# EAGLE board M_3x4 (EAGLE 9.6.2)
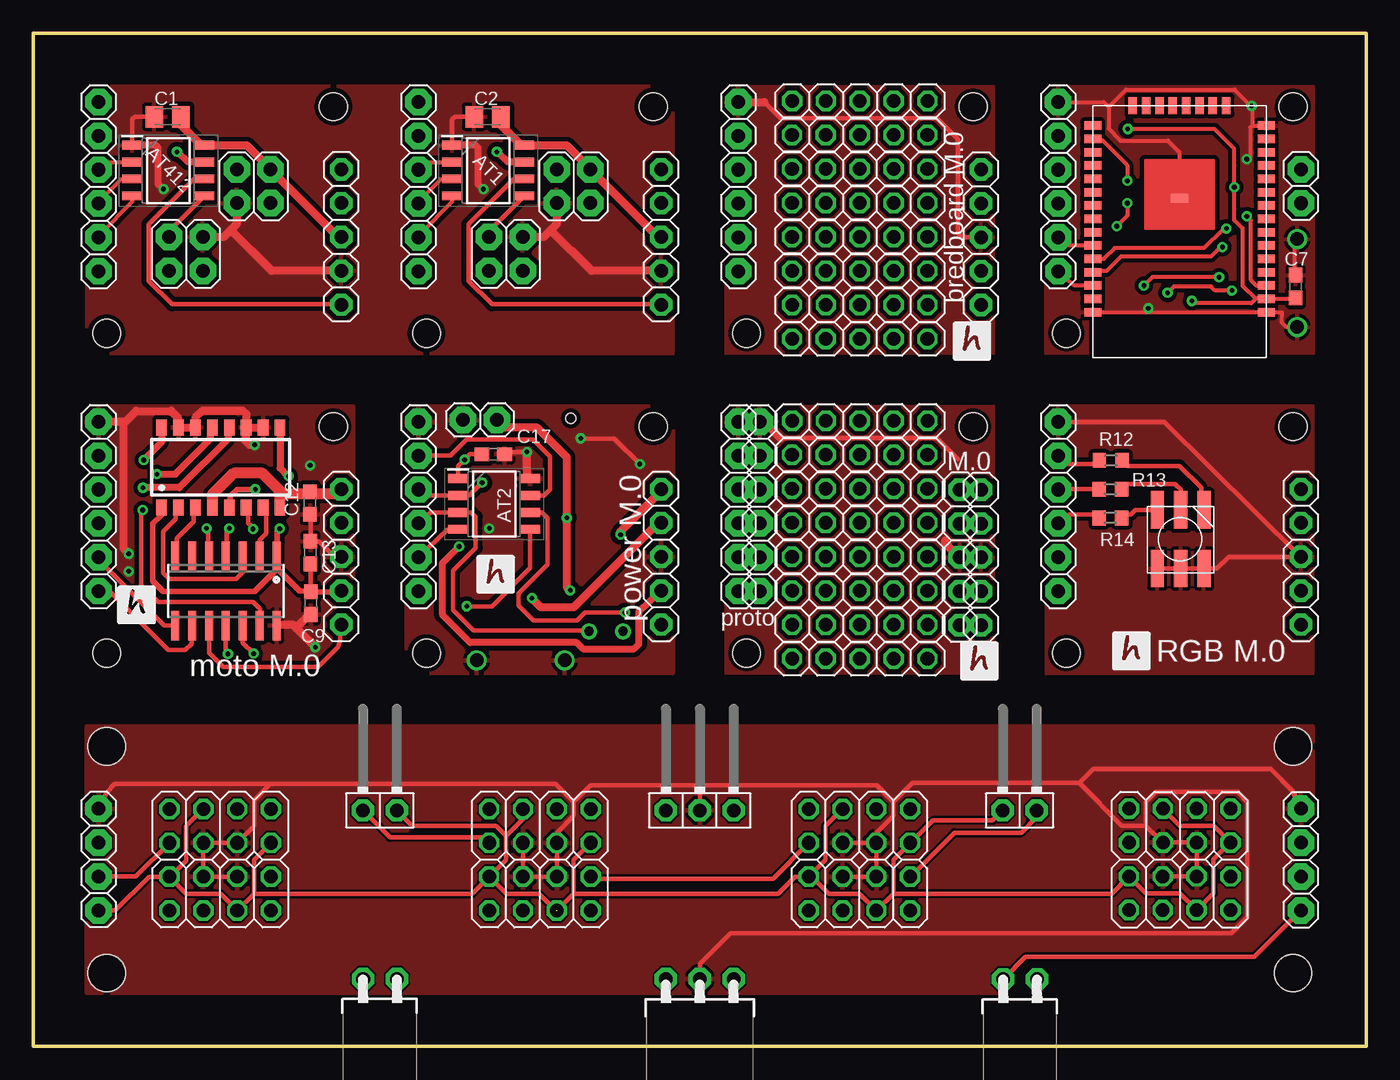
[diagram p0: board, top side]
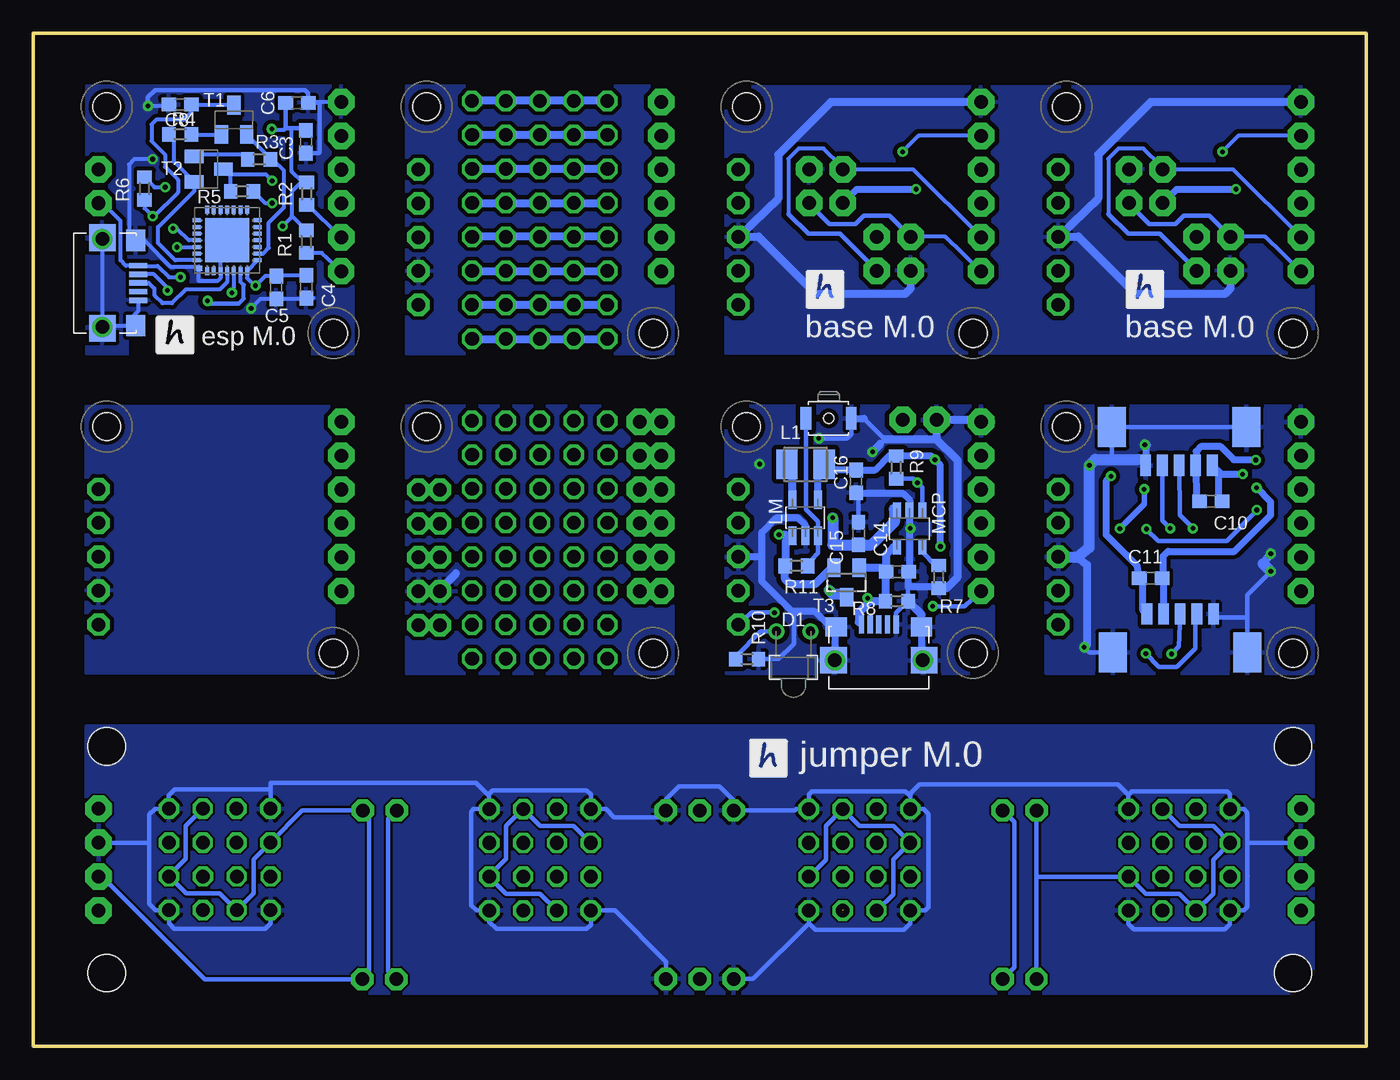
[diagram p1: board, bottom side, seen from below]

Size 100 x 76 mm. Coordinates in mm from the lower left corner, seen from the top.
Outline: 0,0 100,0 100,76 0,76 0,0
Copper layers (1*16): Top 0.035mm / dielectric 1.5mm / Bottom 0.035mm
Design rules "default *": minimum track width 10mil, minimum drill 0.35mm, track to track 6mil, track to pad 6mil, pad to pad 6mil, via to via 6mil, smd to smd 6mil, copper to edge 0mil, drill to drill 15mil, minimum pad ring 10mil, minimum via ring 8mil, stop-mask expansion 4mil, vias tented up to drill 0mil, thermal gap 10mil
Holes 2.1 mm at 70.5,70.5 53.5,53.5 70.5,46.5 53.5,29.5 5.5,53.5 22.5,70.5 29.5,53.5 46.5,70.5 77.5,53.5 94.5,70.5 5.5,29.5 22.5,46.5 29.5,29.5 46.5,46.5 77.5,29.5 94.5,46.5
Holes 2.8 mm at 94.5,5.5 94.5,22.5 5.5,22.5 5.5,5.5

## Footprints (pad centres in the part's own frame; a part is rotated, then mirrored left to right if it is on the bottom)
SOIC127P600X175-8N = smd 1.5 x 0.65: 1 -2.7,1.905; 2 -2.7,0.635; 3 -2.7,-0.635; 4 -2.7,-1.905; 5 2.7,-1.905; 6 2.7,-0.635; 7 2.7,0.635; 8 2.7,1.905
C0805K = smd 1.3 x 1.6: 1 -1,0; 2 1,0
C0603 = smd 1.1 x 1: 1 -0.85,0; 2 0.85,0
LED1.8 = drill 0.7: A -1.27,-0.4; K 1.27,-0.4
MLP28 = smd 0.6 x 0.3: 1 -2.3,1.5; 2 -2.3,1; 3 -2.3,0.5; 4 -2.3,0; 5 -2.3,-0.5; 6 -2.3,-1; 7 -2.3,-1.5; 15 2.3,-1.5; 16 2.3,-1; 17 2.3,-0.5; 18 2.3,0; 19 2.3,0.5; 20 2.3,1; 21 2.3,1.5 | smd 0.3 x 0.6: 8 -1.5,-2.3; 9 -1,-2.3; 10 -0.5,-2.3; 11 0,-2.3; 12 0.5,-2.3; 13 1,-2.3; 14 1.5,-2.3; 22 1.5,2.3; 23 1,2.3; 24 0.5,2.3; 25 0,2.3; 26 -0.5,2.3; 27 -1,2.3; 28 -1.5,2.3 | smd 3.3 x 3.3: EXP 0,0 | smd 0.435 x 0.435: M -2.103,2.103
SO14 = smd 0.6 x 2.2: 1 -3.81,-2.6; 2 -2.54,-2.6; 3 -1.27,-2.6; 4 0,-2.6; 5 1.27,-2.6; 6 2.54,-2.6; 7 3.81,-2.6; 8 3.81,2.6; 9 2.54,2.6; 10 1.27,2.6; 11 0,2.6; 12 -1.27,2.6; 13 -2.54,2.6; 14 -3.81,2.6
1X06 = drill 1.016 pad 1.93 octagon: 1 -6.35,0 | drill 1.016 pad 1.981 octagon: 2 -3.81,0; 3 -1.27,0; 4 1.27,0; 5 3.81,0; 6 6.35,0
2X02 = drill 1.016 pad 1.981 octagon: 1 -1.27,-1.27; 2 -1.27,1.27; 3 1.27,-1.27; 4 1.27,1.27
1X05 = drill 1.016 pad 1.676 octagon: 1 -5.08,0; 2 -2.54,0; 3 0,0; 4 2.54,0; 5 5.08,0
1X02 = drill 1.016 pad 1.981 octagon: 1 -1.27,0; 2 1.27,0
2X04 = drill 1.016 octagon: 1 -3.81,-1.27; 2 -3.81,1.27; 3 -1.27,-1.27; 4 -1.27,1.27; 5 1.27,-1.27; 6 1.27,1.27; 7 3.81,-1.27; 8 3.81,1.27
1X02/90F = drill 1.016 pad 1.676 octagon: 1 -1.31,0; 2 1.23,0
1X02/90 = drill 1.016 pad 1.676 octagon: 1 -1.27,-3.81; 2 1.27,-3.81
1X03/90 = drill 1.016 pad 1.676 octagon: 1 -2.54,-3.81; 2 0,-3.81; 3 2.54,-3.81
1X03/90F = drill 1.016 pad 1.676 octagon: 1 -2.54,0; 2 0,0; 3 2.54,0
1X04 = drill 1.016 pad 1.981 octagon: 1 -3.81,0; 2 -1.27,0; 3 1.27,0; 4 3.81,0
L3230M = smd 1.6 x 2.2: 1 -1.4,0; 2 1.4,0
SOT32-5 = smd 0.6 x 1.4: BP 0.95,1.35; GND 0,-1.35; SHDN 0.95,-1.35; VIN -0.95,-1.35; VOUT -0.95,1.35
SOT23-5 = smd 0.6 x 1.1: 1 -0.95,-1.45; 2 0,-1.45; 3 0.95,-1.45; 4 0.95,1.35; 5 -0.95,1.35
SOP16 = smd 0.8 x 1.2: 1 -4.445,-3; 2 -3.175,-3; 3 -1.905,-3; 4 -0.635,-3; 5 0.635,-3; 6 1.905,-3; 7 3.175,-3; 8 4.445,-3; 9 4.445,3; 10 3.175,3; 11 1.905,3; 12 0.635,3; 13 -0.635,3; 14 -1.905,3; 15 -3.175,3; 16 -4.445,3
R0603 = smd 1 x 1.1: 1 -0.85,0; 2 0.85,0
BUTTON-B3U = smd 0.8 x 1.7: P$1 -1.7,0; P$2 1.7,0 | hole 0.75: 0,0
SOT23-BEC = smd 1 x 1.4: B -0.95,-1.1; C 0,1.1; E 0.95,-1.1
SOT23 = smd 1 x 1.4: D 0,1.1; G -0.95,-1.1; S 0.95,-1.1
1X5_AUTO = drill 1.016 octagon: 1 -5.08,0; 2 -2.54,0; 3 0,0; 4 2.54,0; 5 5.08,0
TTGO-MICRO-32 = smd 1.27 x 0.635: 3V3 -6.5,5; EN -6.5,4; GND1 -6.5,6; GND2 -6.5,-8; GND3 6.5,6; GND4 0,-2.54; IO0 6.5,-7; IO2 6.5,-8; IO4 6.5,-6; IO5 6.5,-3; IO12 -6.5,-7; IO14 -6.5,-6; IO16 6.5,-5; IO17 6.5,-4; IO18 6.5,-2; IO19 6.5,-1; IO21 6.5,1; IO22 6.5,4; IO23 6.5,5; IO25 -6.5,-3; IO26 -6.5,-4; IO27 -6.5,-5; IO32 -6.5,-1; IO33 -6.5,-2; IO34 -6.5,1; IO35 -6.5,0; NC 6.5,0; RXD0 6.5,2; TXD0 6.5,3; VN -6.5,2; VP -6.5,3 | smd 0.635 x 1.27: CLK 0.5,-9.5; CMD -0.5,-9.5; IO13 -3.5,-9.5; IO15 3.5,-9.5; SD0 1.5,-9.5; SD1 2.5,-9.5; SD2 -2.5,-9.5; SD3 -1.5,-9.5
A1250WR = smd 0.8 x 1.6: 1 -2.46,2.54; 2 -1.21,2.54; 3 0.04,2.54; 4 1.29,2.54; 5 2.54,2.54 | smd 2.1 x 3: $1 -5.01,-0.34; $2 5.08,-0.34
RGB_WW-FCE50TC-Q1 = smd 1 x 2.8: 1 -1.778,-2.286; 2 -0.028,-2.286; 3 1.722,-2.286; 4 -1.778,2.114; 5 -0.028,2.114; 6 1.722,2.114
MICRO-USB = smd 0.4 x 1.35: D+ 0,2.5; D- -0.65,2.5; GND 1.3,2.5; NC 0.65,2.5; VUSB -1.3,2.5 | smd 2 x 2: GND1 -3.4,-0.2; GND2 3.4,-0.2 | smd 1.6 x 1.4: GND3 -3.202,2.3; GND4 3.2,2.3 | drill 1: P$1 -3.3,-0.2; P$2 3.3,-0.2

## Placement (x,y rotation side)
AT1  AT412  [SOIC127P600X175-8N]  34.13,65.7 0 top
AT2  AT412  [SOIC127P600X175-8N]  34.59,40.68 0 top
AT412  AT412  [SOIC127P600X175-8N]  10.13,65.7 0 top
C1  100n  [C0805K]  10.08,69.74 0 top
C2  100n  [C0805K]  34.08,69.74 0 top
C3  100n  [C0603]  79.54,67.86 270 bottom
C4  100n  [C0603]  79.51,56.99 90 bottom
C5  10u  [C0603]  81.77,56.94 90 bottom
C6  100n  [C0603]  80.22,70.78 0 bottom
C7  0.1F  [C0603]  94.7,57.01 90 top
C8  2u2  [C0603]  88.99,70.65 180 bottom
C9  100n  [C0603]  20.82,33.24 90 top
C10  100n  [C0603]  11.65,40.89 0 bottom
C11  100n  [C0603]  16.17,35.12 180 bottom
C12  4u7  [C0603]  20.75,40.76 90 top
C13  4u7  [C0603]  20.79,37.03 270 top
C14  4u7  [C0603]  35.17,35.6 180 bottom
C15  4u7  [C0603]  38.09,38.47 270 bottom
C16  10u  [C0603]  38.27,42.38 90 bottom
C17  100n  [C0603]  34.51,44.42 0 top
D1  LED1.8  [LED1.8]  42.97,30.73 180 bottom
IC1  CP2102  [MLP28]  85.46,60.47 90 bottom
IC2  AT414  [SO14]  14.45,34.15 180 top
JP1  [1X06]  28.9,64.5 90 top
JP2  [1X06]  4.9,64.5 90 top
JP3  [2X02]  16.53,64.53 0 top
JP4  [2X02]  11.45,59.46 0 top
JP5  [1X05]  23.1,60.72 270 top
JP6  [2X02]  40.53,64.53 0 top
JP7  [2X02]  35.45,59.46 0 top
JP8  [1X05]  47.1,60.72 270 top
JP9  [1X06]  52.9,64.5 90 top
JP10  [1X06]  76.9,64.5 90 top
JP11  [1X05]  71.1,60.7 270 top
JP12  [1X02]  95.1,64.53 270 top
JP13  [1X06]  4.9,40.5 90 top
JP14  [1X05]  23.1,36.72 270 top
JP15  [1X06]  28.9,40.5 90 top
JP16  [1X05]  47.1,36.72 270 top
JP17  [1X06]  52.9,40.5 90 top
JP18  [1X05]  71.1,36.67 270 top
JP19  [1X06]  54.5,40.5 90 top
JP20  [1X05]  69.5,36.68 270 top
JP21  [1X06]  76.9,40.5 90 top
JP22  [1X05]  95.1,36.72 270 top
JP23  [2X04]  14.02,16.53 180 top
JP24  [1X02/90F]  25.97,5.04 180 top
JP25  [2X04]  14.02,11.45 180 top
JP26  [2X04]  38.01,16.53 180 top
JP27  [2X04]  38.01,11.45 180 top
JP28  [2X04]  61.98,16.53 180 top
JP29  [2X04]  61.98,11.45 180 top
JP30  [1X02/90]  26,21.5 0 top
JP31  [1X03/90]  50,21.5 0 top
JP32  [1X03/90F]  50,5.04 180 top
JP33  [2X04]  86.01,11.47 0 top
JP34  [2X04]  86.02,16.55 0 top
JP35  [1X02/90F]  74,5.02 180 top
JP36  [1X02/90]  74,21.5 0 top
JP37  [1X04]  4.9,14 270 top
JP38  [1X04]  95.1,14 90 top
L1  2u2  [L3230M]  42.05,43.65 0 bottom
LIPOL  [1X02]  33.5,47 0 top
LM  TC  [SOT32-5]  42.08,39.64 0 bottom
MCP  MCP  [SOT23-5]  34.26,38.78 180 bottom
MX1  MX1508  [SOP16]  14.07,43.43 0 top
R1  2k2  [R0603]  79.51,60.36 90 bottom
R2  2k2  [R0603]  79.49,63.97 90 bottom
R3  12k  [R0603]  83.07,66.54 180 bottom
R4  12k  [R0603]  88.99,68.42 0 bottom
R5  12k  [R0603]  84.34,64.15 0 bottom
R6  12k  [R0603]  91.65,64.35 270 bottom
R7  22k  [R0603]  32.07,35.22 90 bottom
R8  100k  [R0603]  35.22,33.39 180 bottom
R9  100k  [R0603]  35.27,43.43 270 bottom
R10  2k2  [R0603]  46.45,29.05 180 bottom
R11  100k  [R0603]  42.74,36.03 0 bottom
R12  330  [R0603]  80.83,43.95 0 top
R13  330  [R0603]  80.81,41.8 0 top
R14  330  [R0603]  80.81,39.63 0 top
RESET  BYTTON-B3U  [BUTTON-B3U]  40.33,47.11 0 bottom
T1  [SOT23-BEC]  84.95,69.51 0 bottom
T2  [SOT23-BEC]  86.83,65.8 270 bottom
T3  FDV  [SOT23]  38.98,34.79 180 bottom
U$1  PINHD-1X5_AUTO  [1X5_AUTO]  62.01,70.93 0 top
U$2  PINHD-1X5_AUTO  [1X5_AUTO]  62,68.38 0 top
U$3  PINHD-1X5_AUTO  [1X5_AUTO]  62,65.82 0 top
U$4  PINHD-1X5_AUTO  [1X5_AUTO]  62,63.27 0 top
U$5  PINHD-1X5_AUTO  [1X5_AUTO]  62,60.73 0 top
U$6  PINHD-1X5_AUTO  [1X5_AUTO]  62,58.17 0 top
U$7  PINHD-1X5_AUTO  [1X5_AUTO]  62,55.62 0 top
U$8  PINHD-1X5_AUTO  [1X5_AUTO]  62,53.07 0 top
U$9  TTGO-MICRO-32  [TTGO-MICRO-32]  85.99,61.08 180 top
U$10  A1250WR  [A1250WR]  14,46.12 180 bottom
U$11  PINHD-1X5_AUTO  [1X5_AUTO]  62.01,46.93 0 top
U$12  PINHD-1X5_AUTO  [1X5_AUTO]  62,44.38 0 top
U$13  PINHD-1X5_AUTO  [1X5_AUTO]  62,41.82 0 top
U$14  PINHD-1X5_AUTO  [1X5_AUTO]  62,39.27 0 top
U$15  PINHD-1X5_AUTO  [1X5_AUTO]  62,36.73 0 top
U$16  PINHD-1X5_AUTO  [1X5_AUTO]  62,34.17 0 top
U$17  PINHD-1X5_AUTO  [1X5_AUTO]  62,31.62 0 top
U$18  PINHD-1X5_AUTO  [1X5_AUTO]  62,29.07 0 top
U$19  RGB_WW-FCE50TC-Q1  [RGB_WW-FCE50TC-Q1]  86.05,37.95 180 top
USB  MICRO-USB  [MICRO-USB]  94.62,57.27 270 bottom
USB1  MICRO-USB  [MICRO-USB]  36.57,29.15 0 bottom
X22  A1250WR  [A1250WR]  14,29.89 0 bottom

## Library data of the parts
AT1 AT2 AT412 = ATTINY412-SSN; DESCRIPTION: 8-bit Microcontrollers - MCU 20MHz, 4KB, SOIC8, Ind 105C, Green, Tube; HEIGHT: 1.75mm; MANUFACTURER_NAME: Microchip; MANUFACTURER_PART_NUMBER: ATTINY412-SSN; MOUSER_PART_NUMBER: 579-ATTINY412-SSN; MOUSER_PRICE-STOCK: https://www.mouser.co.uk/ProductDetail/Microchip-Technology/ATTINY412-SSN?qs=3HJ2avRr9PItQG9ZsCamPQ%3D%3D
C1-C17 = rcl; SPICEPREFIX: C
D1 LM MCP RESET T3 U$19 = !stavebnice03
IC1 = silabs; MF: FARNELL; MPN: CP2102-GM; OC_FARNELL: 9282130; OC_NEWARK: 30K5635
IC2 = atmel
JP1-JP38 LIPOL U$1-U$8 U$11-U$18 = pinhead2
L1 = rcl; SPICEPREFIX: L
MX1 U$9 U$10 USB USB1 X22 = hugo
R1-R11 = rcl; SPICEPREFIX: R
R12-R14 = resistor
T1 T2 = transistor

## Nets
FOTO1: IC2.5 U$10.3
FOTO2: IC2.12 X22.4
GND: AT1.8 AT412.8 C1.2 C2.2 JP1.6 JP2.6 JP3.4 JP4.1 JP5.3 JP6.4 JP7.1 JP8.3
GND1: JP9.6 JP11.3
GND2: C3.2 C4.1 C5.1 C6.2 C7.2 C8.2 IC1.3 IC1.EXP IC1.M JP10.6 U$9.GND1 U$9.GND2 U$9.GND3 U$9.GND4 USB.GND USB.GND1 USB.GND2 USB.GND3 USB.GND4 USB.P$1 USB.P$2
GND3: C9.1 C12.1 C13.1 IC2.14 JP13.6 JP14.3 MX1.10 MX1.11 MX1.14 MX1.15 U$10.5 U$10.$1 U$10.$2 X22.5 X22.$1 X22.$2
GND4: AT2.8 C14.1 C15.1 C16.1 C17.2 JP15.6 JP16.3 LIPOL.1 LM.GND MCP.2 R7.1 R8.1 R10.1 RESET.P$2 USB1.GND USB1.GND1 USB1.GND2 USB1.GND3 USB1.GND4 USB1.P$1 USB1.P$2
GND5: JP17.6 JP18.3 JP19.6 JP20.3
GND6: JP21.6 JP22.3 U$19.4 U$19.5 U$19.6
GND7: JP23.1 JP23.7 JP25.2 JP25.8 JP26.1 JP26.7 JP27.2 JP27.8 JP28.1 JP28.7 JP29.2 JP29.8 JP31.1 JP31.3 JP32.1 JP32.3 JP33.1 JP33.7 JP34.2 JP34.8 JP37.2 JP38.3
INA1: IC2.3 MX1.2
INA2: IC2.13 MX1.6
INB1: IC2.7 MX1.3
INB2: IC2.2 MX1.7
LED1: IC2.4 U$10.4
LED2: IC2.11 X22.3
M1: C10.2 MX1.13 U$10.1
M2: C10.1 MX1.16 U$10.2
M3: C11.2 MX1.9 X22.1
M4: C11.1 MX1.12 X22.2
M_SRC: C12.2 JP14.1 MX1.4 MX1.8
N$1: U$1.1 U$1.2 U$1.3 U$1.4 U$1.5
N$2: U$2.1 U$2.2 U$2.3 U$2.4 U$2.5
N$3: U$3.1 U$3.2 U$3.3 U$3.4 U$3.5
N$4: U$4.1 U$4.2 U$4.3 U$4.4 U$4.5
N$5: U$5.1 U$5.2 U$5.3 U$5.4 U$5.5
N$6: U$6.1 U$6.2 U$6.3 U$6.4 U$6.5
N$7: U$7.1 U$7.2 U$7.3 U$7.4 U$7.5
N$8: U$8.1 U$8.2 U$8.3 U$8.4 U$8.5
N$9: IC1.5 USB.D-
N$10: IC1.4 USB.D+
N$11: IC1.25 U$9.RXD0
N$12: IC1.26 U$9.TXD0
N$13: R4.2 T1.B
N$14: R3.2 T2.B
N$15: IC1.9 R3.1 T1.E
N$16: IC1.28 R4.1 T2.E
N$17: R5.1 T2.C U$9.IO0
N$18: C8.1 R6.2 T1.C U$9.EN
N$19: U$9.IO2
N$20: IC2.9 JP13.1
N$21: IC2.8 JP13.2
N$22: IC2.10 JP14.5
N$23: C15.2 LIPOL.2 MCP.3 T3.D
N$24: C14.2 JP16.2 MCP.4 R8.2 T3.G USB1.VUSB
N$25: MCP.5 R7.2
N$26: JP16.1 LM.VIN R11.1 T3.S
N$27: D1.K R10.2
N$28: LM.SHDN R11.2 RESET.P$1
N$29: L1.1 LM.VOUT
N$30: JP17.5 JP19.5
N$31: JP17.4 JP19.4
N$32: JP17.3 JP19.3
N$33: JP17.2 JP19.2
N$34: JP17.1 JP19.1
N$35: JP18.5 JP20.5
N$36: JP18.2 JP20.2
N$37: JP18.1 JP20.1
N$38: R13.2 U$19.2
N$39: R12.2 U$19.1
N$40: R14.2 U$19.3
N$41: JP21.5 R12.1
N$42: JP21.4 R13.1
N$43: JP21.3 R14.1
PA1: AT1.7 JP1.5
PA2: AT1.2 JP1.4
PA3: AT412.7 JP2.5
PA4: AT1.3 JP1.3
PA5: AT2.7 JP15.5
PA6: AT412.2 JP2.4
PA7: AT412.3 JP2.3
PA8: AT2.2 JP15.4 MCP.1 R9.2
PA9: AT2.3 D1.A JP15.3
SCL: AT412.5 JP2.1 JP3.3 JP4.2
SCL1: AT1.5 JP1.1 JP6.3 JP7.2
SCL2: JP10.1 R1.1 U$9.IO22
SCL3: AT2.5 JP15.1
SCL4: JP23.2 JP23.5 JP24.1 JP25.4 JP25.7 JP26.2 JP26.5 JP27.4 JP27.7 JP28.2 JP28.5 JP29.4 JP29.7 JP30.2 JP33.2 JP33.5 JP34.4 JP34.7 JP35.2 JP36.1 JP37.4 JP38.1
SDA: AT412.4 JP2.2 JP3.2 JP4.3
SDA1: AT1.4 JP1.2 JP6.2 JP7.3
SDA2: JP10.2 R2.1 U$9.IO21
SDA3: AT2.4 JP15.2
SDA4: JP23.3 JP23.8 JP24.2 JP25.1 JP25.6 JP26.3 JP26.8 JP27.1 JP27.6 JP28.3 JP28.8 JP29.1 JP29.6 JP30.1 JP33.3 JP33.8 JP34.1 JP34.6 JP35.1 JP36.2 JP37.3 JP38.2
UPDI: AT412.6 JP5.5
UPDI1: AT1.6 JP8.5
UPDI2: AT2.6 JP16.5
VCC: C9.2 C13.2 IC2.1 JP14.4 MX1.1 MX1.5
VCC1: JP23.4 JP23.6 JP25.3 JP25.5 JP26.4 JP26.6 JP27.3 JP27.5 JP28.4 JP28.6 JP29.3 JP29.5 JP31.2 JP32.2 JP33.4 JP33.6 JP34.3 JP34.5 JP37.1 JP38.4
VDD: AT1.1 AT412.1 C1.1 C2.1 JP3.1 JP4.4 JP5.4 JP6.1 JP7.4 JP8.4
VDD1: JP11.4
VDD2: C3.1 C6.1 C7.1 IC1.6 R1.2 R2.2 R5.2 R6.1 U$9.3V3
VDD3: AT2.1 C16.2 C17.1 JP16.4 L1.2 LM.BP R9.1
VDD4: JP18.4 JP20.4
VDD5: JP22.4
VUSB: C4.2 C5.2 IC1.7 IC1.8 JP12.2 USB.VUSB

## Tracks (layer width: path | path; a pad name or v marks a point on that pad's centre or on a via)
FOTO1  (via drill 0.35)
  Top 0.356: IC2.5 13.13,36.81 13.13,38.73 v13,38.85
  Bottom 0.356: v13,38.85 13,38.88 13.98,39.86 14.01,43.55 U$10.3
FOTO2  (via drill 0.35)
  Top 0.356: IC2.12 15.72,30.27 v16.53,29.46
  Bottom 0.356: v16.53,29.46 15.54,28.46 14.19,28.46 12.8,29.86 12.8,32.43 X22.4
GND
  Top 0.61: C1.2 11.08,69.1 12.58,67.6 AT412.8 12.87,67.57 16.03,67.57 JP3.4 17.8,65.78 22.86,60.72 JP5.3 | C2.2 35.08,69.1 36.58,67.6 AT1.8 36.87,67.57 40.03,67.57 JP6.4 41.8,65.78 46.86,60.72 JP8.3
  Bottom 0.61: 10.14,58.15 JP4.1 10.19,56.86 10.61,56.44 17.27,56.44 21.58,60.74 22.98,60.74 JP5.3 20.11,63.61 20.11,66.9 16.16,70.85 JP2.6 | 34.14,58.15 JP7.1 34.19,56.86 34.6,56.44 41.27,56.44 45.58,60.74 46.98,60.74 JP8.3 44.11,63.61 44.11,66.9 40.16,70.85 JP1.6
  pour Bottom (isolate 0.356): 4,72 4,52 48,52 48,72
GND1
  Top 0.356: 54.85,70.85 56.07,69.63 56.38,69.63 56.39,69.65 67.78,69.65 69.35,68.07 69.35,61.01 69.66,60.7 JP11.3
  Top 0.61: JP9.6 54.85,70.85
  pour Top (isolate 0.305): 52,72 72,72 72,52 52,52
GND2  (via drill 0.35)
  Top 0.305: 91.45,69.08 U$9.GND2 | 91.45,69.08 91.3,68.92 91.3,66.81 v91.05,66.56 | U$9.GND4 85.99,67.1 85.13,67.96 81.57,67.96 80.68,68.85 80.68,70.48 | USB.P$1 94.61,60.36 94.61,57.95 C7.2 | 83.55,55.06 92.47,55.06 U$9.GND1 92.52,55.05 93.69,55.05 93.69,54.29 94.02,53.97 USB.P$2 | 83.55,55.06 79.75,55.06 79.73,55.08 U$9.GND3 79.36,55.08 | 91.45,69.08 91.45,70.5 v91.4,70.55 91.33,70.55 90.11,71.77 81.97,71.77 80.68,70.48 | v83.65,55.36 83.65,55.16 83.55,55.06 | JP10.6 80.31,70.85 80.68,70.48
  Bottom 0.305: IC1.3 85.96,59.97 IC1.EXP | IC1.3 85.98,58.15 | 92.7,54.02 92.37,54.02 USB.GND4 | 92.7,54.02 94.67,54.02 USB.GND2 USB.GND1 | 94.72,60.47 USB.P$1 | 91.08,66.6 v91.05,66.56 92.42,66.56 92.83,66.15 92.83,60.98 USB.GND3 91.68,60.47 89.72,58.51 87.56,58.51 87.46,58.4 IC1.M 87.59,58.33 87.59,57.41 86.18,57.41 85.95,57.64 IC1.3 | C8.2 89.94,70.55 v91.4,70.55 | 92.7,54.02 92.64,54.07 92.64,54.64 92.12,55.16 USB.GND | C4.1 79.56,56.09 C5.1 82.93,56.09 v83.65,55.36 | JP10.6 79.3,70.85 C6.2
  Bottom 0.356: C3.2 78.58,67.01 78.52,67.07 78.52,70.68 78.62,70.78 C6.2 79.37,71.52 79.6,71.74 90.87,71.74 91.4,71.21 v91.4,70.55 | C4.1 79.01,56.14
  pour Top (isolate 0.305): 76,52 76,72 96,72 96,52
  pour Bottom (isolate 0.305): 76,72 96,72 96,52 76,52
GND3  (via drill 0.35)
  Top 0.356: 20.04,31.68 20.04,31.61 19.76,31.34 | C12.1 20.79,39.87 C13.1 21.44,37.88 22.6,36.72 JP14.3
  Top 0.61: C9.1 20.74,32.39 20.04,31.68 19.98,31.63 | IC2.14 18.26,31.63 19.46,31.63 19.76,31.34 v21.15,29.94 | MX1.11 MX1.10 | MX1.11 15.97,47.41 15.72,47.67 12.67,47.67 12.16,47.16 MX1.14 MX1.15 10.86,46.46 10.86,47.15 10.35,47.66 7.7,47.66 6.77,46.73 6.75,46.73 | MX1.11 15.92,46.38 15.92,45.43 16.23,45.13 v16.61,45.13 | JP13.6 5.02,46.83 6.75,46.83 6.75,46.73 | 6.75,46.73 6.75,37.36 v7.16,36.95
  Bottom 0.305: 20.95,30.14 v21.15,29.94 | 17.08,44.02 16.99,44.02 U$10.5
  Bottom 0.356: 7.72,36.19 7.85,36.19 7.87,36.19 | v7.16,35.63 8.91,33.87 8.91,32.17 8.92,32.17 | 8.92,32.17 X22.$2 | X22.$1 20.76,29.55 20.99,29.73 20.99,29.78 v21.15,29.94 | X22.5 11.3,32.17 8.92,32.17 | 19.02,44.02 19.08,44.09 U$10.$2 U$10.$1
  Bottom 0.508: U$10.5 16.51,45.02 16.45,45.07
  Bottom 0.61: v16.61,45.13 16.51,45.13 16.45,45.07 | v7.16,36.95 7.16,36.88 7.85,36.19 | JP14.3 21.73,36.72 20.95,36.12 20.95,30.14
  Bottom 0.813: 17.08,44.02 19.02,44.02 20.33,44.02 v20.77,43.58 20.77,37.4 21.63,36.72 JP14.3 | v7.16,35.63 7.72,36.19
  pour Top (isolate 0.305): 4,48 4,28 24,28 24,48
  pour Bottom (isolate 0.305): 4,48 4,28 24,28 24,48
GND4  (via drill 0.35)
  Top 0.356: 35.56,44.42 C17.2 35.54,44.59 v37.03,44.59 | v41.06,45.61 43.58,45.61 v45.51,43.68
  Top 0.61: AT2.8 37.03,42.84 v37.03,44.59
  Bottom 0.356: USB1.GND 35.27,32.5 R8.1 34.37,34.43 | R10.1 44.09,29.05 42.94,30.19 42.94,32.48 42.94,32.5 43.05,32.61 | C16.1 38.09,41.36 C15.1 | 37.68,47.11 36.1,45.53 | RESET.P$2 38.63,45.94 38.96,45.61 v41.06,45.61 | v34.21,38.85 34.21,40.18 MCP.2
  Bottom 0.406: 42.69,39.67 42.65,39.67
  Bottom 0.508: C16.1 38.22,41.49 34.77,41.49 34.25,40.96 34.25,40.24 MCP.2 34.26,35.67 C14.1 | C14.1 34.37,35.55 34.37,34.43 34.31,34.5 32.2,34.5 R7.1 31.72,34.37 | 34.37,33.49 R8.1 | C14.1 34.32,35.81 | RESET.P$2 37.68,47.11 | USB1.GND3 | USB1.P$1 39.87,30.97 39.4,31.45 USB1.GND3 | USB1.GND4 33.37,29.15 USB1.GND2 | USB1.GND3 40.19,31.45 41.35,32.61 43.05,32.61 | 45.35,36.72 45.35,38.56 44.24,39.67 42.69,39.67 | 42.65,39.67 42.08,39.1 LM.GND | 45.35,36.72 JP16.3 | 42.94,32.48 45.35,34.88 45.35,36.72
  Bottom 0.61: USB1.GND4 33.37,32.39 R8.1 | JP15.6 29.06,46.85 29.21,47 LIPOL.1 32.23,45.53 | 32.23,45.53 30.68,43.98 30.68,35.16 31.46,34.37 R7.1 | 32.23,45.53 36.09,45.53 36.1,45.53 | 36.45,45.18 v37.03,44.59
  pour Top (isolate 0.356): 28,48 28,28 48,28 48,48
  pour Bottom (isolate 0.356): 28,48 48,48 48,28 28,28
GND5
  Top 0.356: 69.69,36.67 JP18.3 | 56.07,45.63 56.38,45.63 56.39,45.65 67.78,45.65 69.35,44.07
  Top 0.61: JP20.3 68.42,37.71 68.42,37.91 | JP19.6 54.87,46.83 56.07,45.63
  Bottom 0.61: JP18.3 69.51,36.67 JP20.3 | JP19.6 52.94,46.83 JP17.6
  pour Top (isolate 0.305): 52,48 72,48 72,28 52,28
GND6
  Top 0.356: U$19.6 U$19.5 U$19.4 88.8,35.84 89.68,36.72 JP22.3 84.87,46.85 JP21.6
  pour Top (isolate 0.305): 76,48 76,28 96,28 96,48
GND7
  Bottom 0.356: JP28.7 58.17,18.89 58.48,19.19 65.56,19.19 65.89,18.86 | JP28.7 58.17,18.38 | JP26.7 34.2,18.74 34.31,18.85 | 34.31,18.85 34.58,19.12 41.59,19.12 41.82,18.89 JP26.1 42.76,17.8 42.87,17.69 JP31.1 47.46,18.46 48.51,19.51 51.56,19.51 52.54,18.53 JP31.3 53.04,17.19 56.42,17.19 57.03,17.8 JP28.7 | JP26.7 33.21,17.8 32.83,17.41 32.83,10.4 33.06,10.18 JP27.8 34.2,9.21 34.68,8.73 41.34,8.73 41.82,9.21 | JP23.1 17.83,18.85 | 17.83,18.85 17.57,19.12 10.42,19.12 10.21,18.91 JP23.7 9.2,17.8 8.91,17.5 8.91,15.29 | 17.85,9.26 17.83,9.3 JP25.2 17.83,9.17 17.41,8.75 10.61,8.75 10.21,9.15 JP25.8 9.2,10.18 8.91,10.47 8.91,12.72 | 8.91,15.29 8.91,12.72 | JP27.2 41.82,9.21 | JP29.8 58.17,9.11 58.48,8.8 65.26,8.8 65.79,9.34 JP29.2 66.76,10.18 67.16,10.58 67.16,17.59 66.96,17.8 JP28.1 65.79,18.76 65.89,18.86 | JP29.8 58.17,9.54 | JP26.7 34.2,18.81 | 34.31,18.85 33.52,19.65 18.63,19.65 17.83,18.85 | JP34.2 82.21,19.26 | 82.21,19.26 82.21,19.76 66.79,19.76 65.89,18.86 | 91.3,15.18 91.3,17.38 90.86,17.81 JP34.8 89.83,18.82 89.38,19.26 82.21,19.26 | 91.3,15.18 91.3,10.68 90.82,10.2 JP33.7 89.82,9.2 89.43,8.81 82.59,8.81 82.2,9.2 JP33.1 | JP32.3 45.99,5.04 41.82,9.21 | JP32.1 52.54,6.35 56.37,10.18 JP29.8 | 8.9,12.73 8.91,12.72 | JP37.2 8.89,15.27 8.91,15.29 | JP38.3 91.39,15.27 91.3,15.18
  pour Bottom: 96,4 4,4 4,24 96,24
INA1
  Top 0.356: IC2.3 15.72,35.55 15.21,35.04 10.21,35.04 9.75,35.49 9.75,38.6 10.7,39.54 10.7,40.23 MX1.2
INA2  (via drill 0.35)
  Top 0.356: IC2.13 17.01,31.57 17.01,32.81 16.51,33.32 9.37,33.32 8.1,34.58 8.1,40.13 v8.2,40.23 | MX1.6 16.12,40.27 16.12,39.26 16.53,38.85 v16.48,38.8
  Bottom 0.356: v16.48,38.8 16.48,38.78 15.61,37.92 10.47,37.92 8.2,40.19 v8.2,40.23
INB1
  Top 0.356: MX1.3 12.03,40.29 12.03,39.39 10.74,38.1 10.74,36.86 IC2.7
INB2
  Top 0.356: MX1.7 17.47,40.2 17.47,38.47 16.99,37.99 IC2.2
LED1  (via drill 0.35)
  Top 0.356: IC2.4 14.52,36.83 14.52,38.65 14.7,38.83 v14.7,38.85
  Bottom 0.356: U$10.4 15.29,39.44 v14.7,38.85
LED2  (via drill 0.35)
  Top 0.356: IC2.11 14.45,29.58 v14.6,29.43
  Bottom 0.356: v14.6,29.43 14.05,29.98 X22.3
M1  (via drill 0.35)
  Top 0.508: v9.27,42.92 10.65,42.92 13.32,45.59 13.32,46.32 MX1.13
  Bottom 0.508: C10.2 11.06,41.29 11.06,43.09 11.31,43.34 11.54,43.44 U$10.1 10.87,42.94 9.29,42.94 v9.27,42.92
M2  (via drill 0.35)
  Top 0.508: MX1.16 9.62,45.33 v8.28,43.98
  Bottom 0.508: 12.69,40.72 C10.1 12.67,40.87 12.76,40.87 12.78,40.9 | v8.28,43.98 8.3,44.01 9.94,44.01 10.9,44.98 12.41,44.98 12.76,44.64 U$10.2 12.76,40.93 12.78,40.9 | 12.78,40.9 12.75,41.08
M3  (via drill 0.35)
  Top 0.508: v19.15,42.77 19.13,42.75 18.51,43.36 MX1.9
  Bottom 0.356: 17.95,36.82 18,36.87
  Bottom 0.508: v19.15,42.77 19.52,42.4 19.52,38.39 18,36.87 | 17.95,36.82 17.18,36.04 C11.2 16.79,34.74 16.79,32.74 X22.1
M4  (via drill 0.35)
  Top 0.508: v8.22,41.9 10.96,41.9 14.62,45.56 14.62,46.34 MX1.12
  Bottom 0.508: v8.22,41.9 7.16,40.84 7.16,39.85 9.89,37.13 14.87,37.13 15.25,36.75 15.25,35.2 C11.1 15.2,35.12 X22.2
M_SRC
  Top 0.356: C12.2 22.91,41.61 JP14.1
  Top 0.813: 18.5,41.45 MX1.8 18.51,40.53 | 18.5,41.45 18.5,41.67 17.18,42.99 15.03,42.99 13.43,41.39 MX1.4 | JP14.1 22.64,41.45 18.5,41.45
N$1
  Bottom 0.61: U$1.1 U$1.2 U$1.3 U$1.4 U$1.5
N$2
  Bottom 0.61: U$2.5 U$2.4 U$2.3 U$2.2 U$2.1
N$3
  Bottom 0.61: U$3.1 U$3.2 U$3.3 U$3.4 U$3.5
N$4
  Bottom 0.61: U$4.5 U$4.4 U$4.3 U$4.2 U$4.1
N$5
  Bottom 0.61: U$5.1 U$5.2 U$5.3 U$5.4 U$5.5
N$6
  Bottom 0.61: U$6.5 U$6.4 U$6.3 U$6.2 U$6.1
N$7
  Bottom 0.61: U$7.1 U$7.2 U$7.3 U$7.4 U$7.5
N$8
  Bottom 0.61: U$8.5 U$8.4 U$8.3 U$8.2 U$8.1
N$9  (via drill 0.35)
  Top 0.305: v89.93,56.71 88.66,56.71 88.35,57.01 85.58,57.01 v85.1,56.53
  Bottom 0.305: 90.11,56.71 v89.93,56.71 89.93,56.88 90.96,57.92 USB.D- | IC1.5 84.96,56.67 v85.1,56.53
N$10
  Bottom 0.305: IC1.4 85.46,57.33 86.01,56.78 88.56,56.78 89.6,55.74 90.3,55.74 90.92,56.36 90.92,56.86 91.33,57.27 USB.D+
N$11  (via drill 0.35)
  Top 0.305: v89.52,61.35 89.31,61.35 87.84,59.88 81.13,59.88 80.32,59.08 U$9.RXD0
  Bottom 0.305: IC1.25 88.34,60.47 89.23,61.35 v89.52,61.35
N$12  (via drill 0.35)
  Top 0.305: v89.22,59.96 89.06,59.96 88.35,59.25 81.6,59.25 80.53,58.18 79.61,58.18 U$9.TXD0
  Bottom 0.305: v89.22,59.96 89.21,59.97 IC1.26
N$13
  Bottom 0.305: 85.63,68.41 T1.B R4.2
N$14
  Bottom 0.305: 87.75,66.93 T2.B 87.76,66.92 84.3,66.92 R3.2 83.73,66.17
N$15
  Bottom 0.305: T1.E 82.22,66.63 R3.1 82.04,66.54 81.19,65.69 81.19,62.95 82.33,61.81 82.33,59.91 82.77,59.47 IC1.9
N$16
  Bottom 0.305: IC1.28 89.34,58.97 90.64,60.26 90.64,61.46 87.93,64.17 T2.E 89.48,66.4 89.48,68.06 R4.1
N$17  (via drill 0.35)
  Top 0.305: U$9.IO0 79.62,67.95 80.23,67.95 82.08,66.1 v82.08,64.94
  Bottom 0.254: 85.1,65.39 85.32,65.39
  Bottom 0.305: T2.C 85.32,65.39 85.19,65.39 R5.1 | 85.1,65.39 82.54,65.39 v82.08,64.94
N$18  (via drill 0.35)
  Top 0.305: v91.05,62.27 91.35,61.97 91.35,57.49 91.77,57.08 U$9.EN
  Bottom 0.305: T1.C 84.99,70.65 C8.1 88.14,70.13 88.75,69.52 90.78,69.52 91.12,69.18 91.12,67.91 90.12,66.9 90.12,65.99 89.14,65.01 89.14,64.05 90.92,62.27 v91.05,62.27 91.65,62.88 R6.2
N$20
  Top 0.356: IC2.9 11.88,31.52 11.88,30.19 11.4,29.72 10.12,29.72 5.69,34.15 JP13.1
N$21
  Top 0.356: IC2.8 9.82,31.55 5,36.38 JP13.2
N$22
  Top 0.356: 13.1,31.48 IC2.10 13.18,29.52 14.23,28.47 21.36,28.47 22.86,29.96 23,30.48 JP14.5
N$23  (via drill 0.35)
  Top 0.61: v40.28,34.21 40.02,34.46 v40.02,39.64 40.02,44.19 37.79,46.42 35.35,46.42 LIPOL.2
  Bottom 0.356: 35.41,40.28 35.36,40.23 MCP.3
  Bottom 0.813: 35.41,40.28 35.41,39.32 37.11,37.62 C15.2 40.02,37.62 v40.02,39.64 | v40.28,34.21 40.01,33.94 39.23,33.94 T3.D
N$24  (via drill 0.35)
  Top 0.61: v37.41,33.62 v37.41,33.61 38.08,32.94 40.55,32.94 46.87,39.26 JP16.2
  Bottom 0.356: MCP.4 35.49,37.43 | 38.07,31.8 37.92,31.65 USB1.VUSB
  Bottom 0.61: 35.49,37.43 36.02,36.89 C14.2 | C14.2 36.31,35.89 T3.G | 38.07,31.8 38.07,32.56 37.24,33.39 37.18,33.39 | C14.2 36.07,35.55 R8.2 37.18,33.39 | v37.41,33.62 37.18,33.39
N$25
  Bottom 0.356: MCP.5 33.31,37.07 32.31,36.07 R7.2
N$26  (via drill 0.35)
  Top 0.61: JP16.1 47,41.58 44.05,38.63 v44.05,38.38
  Bottom 0.356: 43.16,38.29 LM.VIN 43.11,38.29
  Bottom 0.61: 43.16,38.29 43.56,37.89 43.56,36.06 R11.1 43.59,35.06 43.22,34.69 41.31,34.69 40.11,35.89 T3.S | 43.11,38.29 43.28,38.12 43.54,38.38 v44.05,38.38
N$27
  Bottom 0.356: D1.K 45.42,31.13 47.3,29.25 R10.2
N$28
  Bottom 0.356: RESET.P$1 42.04,47.1 42.04,40.28 41.13,39.37 LM.SHDN 41.13,37 41.64,36.49 41.64,36.29 R11.2
N$29
  Bottom 0.61: LM.VOUT 43.03,43.2 43.45,43.63 L1.1
N$30
  Bottom 0.61: JP19.5 52.94,44.29 JP17.5
N$31
  Bottom 0.61: JP19.4 52.94,41.75 JP17.4
N$32
  Bottom 0.61: JP19.3 52.94,39.21 JP17.3
N$33
  Bottom 0.61: JP19.2 52.94,36.67 JP17.2
N$34
  Bottom 0.61: JP19.1 52.94,34.13 JP17.1
N$35
  Bottom 0.61: JP18.5 69.51,31.59 JP20.5
N$36
  Bottom 0.61: JP18.2 69.51,39.22 JP20.2
N$37
  Bottom 0.61: JP18.1 69.51,41.76 JP20.1
N$38
  Top 0.356: U$19.2 86.08,41.76 85.66,42.18 82.04,42.18 R13.2
N$39
  Top 0.356: 87.88,40.29 U$19.1 87.63,40.44 87.63,41.91 86,43.55 82.09,43.55 R12.2
N$40
  Top 0.356: U$19.3 82.68,40.24 82.35,39.91 81.94,39.91 R14.2
N$41
  Top 0.356: R12.1 79.73,43.7 77.61,43.7 JP21.5
N$42
  Top 0.356: R13.1 77.03,41.8 JP21.4
N$43
  Top 0.356: R14.1 79.68,39.91 77.68,39.91 JP21.3
PA1  (via drill 0.35)
  Top 0.508: AT1.7 35.6,66.33 34.8,67.13 v34.78,67.11
  Bottom 0.305: JP1.5 33.58,68.31 v34.78,67.11
PA2
  Top 0.305: JP1.4 29.56,66.33 AT1.2
PA3  (via drill 0.35)
  Top 0.508: AT412.7 11.6,66.33 10.8,67.13 v10.78,67.11
  Bottom 0.305: JP2.5 9.57,68.31 v10.78,67.11
PA4
  Top 0.305: JP1.3 29,63.48 30.55,65.03 31.4,65.03 AT1.3
PA5
  Top 0.356: 29.02,44.28 JP15.5 31.31,44.31 32.51,45.51 37.49,45.51 38.75,44.24 38.75,41.76 38.31,41.32 AT2.7 | AT2.7 37.02,41.32 | AT2.7 37.31,41.34
PA6
  Top 0.305: JP2.4 5.56,66.33 AT412.2
PA7
  Top 0.305: JP2.3 5,63.48 6.55,65.03 7.4,65.03 AT412.3
PA8  (via drill 0.35)
  Top 0.356: JP15.4 29.45,41.32 AT2.2 32.71,41.32 v33.67,42.28
  Bottom 0.356: 35.03,42.33 R9.2 33.97,42.58 v33.67,42.28 33.31,41.92 MCP.1
PA9
  Top 0.356: JP15.3 29.82,40.05 AT2.3 32.86,40.05 33.19,39.72 33.19,37.39 31.51,35.7 31.51,32.74 33.04,31.2 41.62,31.2 D1.A
SCL
  Top 0.356: AT412.5 10.19,61.14 JP4.2
  Bottom 0.305: 10.1,60.75 JP4.2 7.58,60.73 JP2.1
  Bottom 0.356: JP3.3 17.8,63.22 16.26,61.69 14.31,61.69 13.69,62.3 11.76,62.3 JP4.2
SCL1
  Top 0.356: AT1.5 34.19,61.14 JP7.2
  Bottom 0.305: 34.1,60.75 JP7.2 31.58,60.73 JP1.1
  Bottom 0.356: JP6.3 41.8,63.22 40.26,61.69 38.31,61.69 37.69,62.3 35.76,62.3 JP7.2
SCL2
  Top 0.305: U$9.IO22 78.07,57.08 JP10.1
  Bottom 0.305: JP10.1 78.36,59.52 R1.1
SCL3  (via drill 0.35)
  Top 0.356: AT2.5 37.29,35.88 34.42,33.01 v32.52,33.01
  Bottom 0.356: v32.52,33.01 30.14,33.01 JP15.1
SCL4  (1 unrouted)
  Top 0.356: 39.2,10.21 39.15,10.23 37.93,11.45 35.49,11.45 34.22,12.72 JP27.7 | 34.15,12.72 JP27.7 | JP27.7 34.2,12.66 | JP29.7 59.44,13.99 59.44,16.54 JP28.5 | 64.52,11.45 JP29.4 61.98,11.45 59.69,11.45 58.41,12.72 JP29.7 | 65.79,15.24 JP28.2 | 64.52,11.45 64.52,13.97 65.79,15.24 | JP34.4 86.02,16.55 88.58,16.55 89.36,15.76 89.36,15.74 JP34.7 88.55,14 88.55,11.47 JP33.5 87.28,10.22 86.03,11.47 83.47,11.47 JP33.2 80.9,11.45 64.52,11.45 | JP23.2 16.56,13.99 16.56,11.43 | 16.56,11.43 15.31,10.18 JP25.4 15.29,10.19 14.04,11.45 11.48,11.45 JP25.7 | JP23.5 11.48,16.53 11.48,13.92 10.28,12.72 JP25.7 | JP26.2 40.55,13.99 40.55,11.45 | JP26.5 36.74,17.05 35.47,15.78 | JP27.7 35.47,13.99 35.47,15.78 | 16.56,11.43 17.29,11.43 17.31,11.45 32.93,11.45 JP27.7 | JP30.2 27.27,17.66 28.41,16.53 34.73,16.53 35.47,15.78 | 40.55,11.45 JP27.4 | 40.55,11.45 55.88,11.45 57.16,12.72 JP29.7 | JP36.1 71.97,16.93 67.48,16.93 65.79,15.24 | JP35.2 74.45,6.7 91.61,6.7 JP38.1 | JP37.4 6.15,10.19 8.68,12.72 JP25.7
  Bottom 0.356: JP24.1 27.26,5.04 26.39,5.9 26.39,16.81 JP30.2 | JP35.2 73.38,5.63 73.38,17.04 JP36.1
SDA
  Top 0.305: JP2.2 5,60.94 7.43,63.38 AT412.4
  Bottom 0.305: 19.35,62.45 19.35,66.59 18.59,67.35 16.71,67.35 15.39,66.03 JP3.2 9.99,65.8 5,60.81 JP2.2
  Bottom 0.356: 19.35,62.45 17.85,60.95 15.49,60.95 JP4.3
SDA1
  Top 0.305: JP1.2 29,60.94 31.43,63.38 AT1.4
  Bottom 0.305: 43.35,62.45 43.35,66.59 42.59,67.35 40.71,67.35 39.39,66.03 JP6.2 33.99,65.8 29,60.81 JP1.2
  Bottom 0.356: 43.35,62.45 41.85,60.95 39.49,60.95 JP7.3
SDA2
  Top 0.305: U$9.IO21 77.61,60.08 JP10.2
  Bottom 0.305: JP10.2 79.43,63.12 R2.1
SDA3
  Top 0.356: AT2.4 31.09,38.78 JP15.2
SDA4
  Top 0.356: JP36.2 75.27,17.15 74.13,16.01 69.09,16.01 JP29.1 | JP26.8 33.79,15.66 26.76,15.66 JP30.1 | JP28.8 55.48,12.56 41.97,12.56 JP27.1 | JP37.3 7.69,12.73 JP23.8
  Bottom 0.356: 12.78,10.18 JP25.6 | JP27.6 36.69,10.18 35.47,11.39 35.47,14.01 34.22,15.26 JP26.8 34.2,15.27 35.45,16.53 38.01,16.53 JP26.3 39.28,17.79 40.55,16.52 40.55,13.99 JP27.1 | JP28.8 58.2,15.26 59.47,16.53 61.98,16.53 JP28.3 64.52,16.53 64.52,14.07 65.79,12.8 JP29.1 64.52,11.45 61.98,11.45 JP29.6 | JP34.6 88.56,16.55 88.56,14.06 89.82,12.8 JP33.8 88.55,11.47 86.02,11.47 JP33.3 83.47,11.47 83.47,14.02 JP34.1 82.21,15.3 79.82,17.69 JP36.2 74.8,17.22 74.8,5.53 JP35.1 87.15,5.02 94.5,12.37 JP38.2 | JP23.3 14.02,16.53 11.47,16.53 10.21,15.27 JP23.8 11.48,13.99 11.48,11.43 12.74,10.18 JP25.6 | JP25.6 14.02,11.45 16.53,11.45 17.8,12.72 JP25.1 24.62,12.72 24.74,12.59 | JP30.1 24.74,17.68 24.74,12.59 | 24.74,12.59 JP24.2
UPDI
  Top 0.356: AT412.6 12.04,65.06 8.66,61.68 8.66,57.42 10.41,55.67 22.97,55.67 JP5.5
UPDI1
  Top 0.356: AT1.6 36.04,65.06 32.66,61.68 32.66,57.42 34.41,55.67 46.97,55.67 JP8.5
UPDI2  (via drill 0.35)
  Top 0.356: AT2.6 38.17,40.05 38.57,39.64 38.57,36.14 36.39,33.95 36.39,33.08 37.53,31.94 40.81,31.94 41.4,32.53 v44.39,32.53
  Bottom 0.356: JP16.5 46.11,32.53 v44.39,32.53
VCC  (via drill 0.35)
  Top 0.356: C13.2 20.79,34.56 20.5,34.26
  Top 0.406: 9.78,40.27 MX1.1 9.62,39.87 8.96,39.21 8.96,34.89 9.75,34.1 16.59,34.1 18.18,35.7 18.18,36.68 IC2.1 | IC2.1 18.31,36.81 18.31,38.65 v18.49,38.83 | MX1.5 14.78,40.51 14.78,41.29 15.28,41.78 v16.66,41.78 | IC2.1 18.21,36.7 18.21,35.92 19.97,34.16 20.59,34.16 | 20.5,34.26 20.59,34.16 | C9.2 20.75,34.16 20.59,34.16 | C9.2 20.79,34.09 20.78,34.09 | JP14.4 23.01,34.09 C9.2
  Bottom 0.406: v16.66,41.78 16.66,40.67 v18.49,38.84 v18.49,38.83
VCC1
  Top 0.356: JP25.5 JP23.6 JP23.4 16.56,16.53 16.56,18.46 17.78,19.68 | JP25.5 | JP25.5 JP25.3 | JP28.6 JP28.4 | JP28.4 JP29.3 JP29.5 | JP26.6 JP27.5 JP27.3 JP26.4 39.28,16 40.55,17.27 40.55,18.32 40.44,18.43 | JP33.4 JP33.6 JP34.5 JP34.3 83.48,16.55 | 83.48,16.55 81.68,16.55 78.48,19.74 | JP28.4 63.25,16 64.52,17.27 64.52,18.32 | 17.78,19.68 39.19,19.68 40.44,18.43 | 40.44,18.43 40.66,18.43 41.79,19.57 50.03,19.57 | 64.52,18.32 63.28,19.57 50.03,19.57 | 64.52,18.32 65.94,19.74 78.48,19.74 | JP31.2 50,19.53 50.03,19.57 | 83.48,16.55 83.48,18.34 84.22,19.09 90.35,19.09 91.1,18.34 91.1,9.68 89.89,8.48 52.29,8.48 50,6.18 JP32.2 | JP37.1 5.5,19.05 6.12,19.68 17.78,19.68 | JP38.4 94.5,19.13 92.83,20.8 79.54,20.8 78.48,19.74
  pour Top: 4,24 96,24 96,4 4,4
VDD  (via drill 0.35)
  Top 0.356: AT412.1 7.43,69.54 7.63,69.74 C1.1 | AT1.1 31.43,69.54 31.63,69.74 C2.1
  Top 0.508: v9.77,64.3 9.34,64.73 9.34,67.45 9.19,67.6 AT412.1 | v33.77,64.3 33.34,64.73 33.34,67.45 33.19,67.6 AT1.1
  Top 0.61: JP3.1 15.26,61.69 14.82,61.24 | JP4.4 14.3,60.73 14.82,61.24 | JP5.4 17.88,58.18 14.82,61.24 | JP6.1 39.26,61.69 38.82,61.24 | JP7.4 38.3,60.73 38.82,61.24 | JP8.4 41.88,58.18 38.82,61.24
  Bottom 0.508: JP3.1 14.22,64.3 v9.77,64.3 | JP6.1 38.22,64.3 v33.77,64.3
  pour Top (isolate 0.356): 4,72 4,52 48,52 48,72
VDD1
  pour Bottom (isolate 0.305): 52,72 72,72 72,52 52,52
VDD2  (via drill 0.35)
  Top 0.305: 91.7,56.08 U$9.3V3 94.61,56.07 C7.1 | 91.7,56.08 91.37,55.74 87.11,55.74 v86.93,55.92 | 91.7,56.08 90.71,57.07 90.71,61.38 90.11,61.99 v90.11,64.45 90.11,67.34 88.63,68.82 v82.1,68.82 | v82.08,63.26 82.08,62.32 v81.29,61.53
  Bottom 0.305: 81.47,70.78 C6.1 | 82.1,68.83 v82.1,68.82 82.04,68.76 81.19,68.76 | 80.62,68.87 80.62,65.63 79.8,64.82 R2.2 79.89,64.82 80.61,64.11 80.61,62.31 | IC1.6 84.46,57.35 84.22,57.11 84.22,56.1 84.6,55.72 | 80.61,62.31 R1.2 | R6.1 90.91,64.45 v90.11,64.45 | R5.2 82.6,63.26 v82.08,63.26 | v81.29,61.53 80.61,62.22 80.61,62.31
  Bottom 0.356: C6.1 81.07,68.87 | 81.07,68.87 81.19,68.76 | C3.1 79.7,68.87 80.62,68.87 81.07,68.87 | v86.93,55.92 86.72,55.72 84.6,55.72
VDD3  (via drill 0.35)
  Top 0.356: 31.93,42.59 AT2.1 31.89,43.55 v32.35,44.01 32.76,44.42 C17.1
  Top 0.508: v31.95,37.49 30.68,36.22 30.68,32.4 32.78,30.29 40.76,30.29 41.24,29.81 45.08,29.81 45.43,30.17 45.43,32.61 JP16.4
  Bottom 0.356: 38.62,43.36 38.75,43.23
  Bottom 0.508: LM.BP 41.13,43.23 40.7,43.65 L1.2 40.54,43.65 40.12,43.23 38.75,43.23 C16.2 36.82,43.23 35.68,44.38 35.37,44.38 R9.1 32.62,44.28 v32.35,44.01 31.95,43.6 v31.95,37.49
VDD4
  Bottom 0.61: JP18.4 69.51,34.13 JP20.4 69.48,34.28 68.29,35.48
  pour Bottom (isolate 0.305): 52,48 72,48 72,28 52,28
VDD5
  pour Bottom (isolate 0.305): 77.5,48 77.5,28 96,28 96,48
VUSB  (via drill 0.35)
  Top 0.305: v88.96,57.7 83.97,57.7 v83.33,57.06
  Bottom 0.305: IC1.8 IC1.7 83.96,57.65 83.37,57.06 v83.33,57.06 82.61,57.79 C5.2 81.72,57.84 C4.2 | v88.96,57.7 89.82,57.7 90.67,58.55 92.1,58.55 USB.VUSB 93.06,58.57 93.46,58.97 93.46,61.92 94.8,63.26 JP12.2

## Text on the board
tPlace: bredboard M.0 | M.0 | power M.0 | proto | RGB M.0 | moto M.0
bPlace: base M.0 | base M.0 | esp M.0 | jumper M.0
bDocu: GND | GND | P4 | P4 | P0 | P0 | VBAT | VBAT | P1 | VUSB | P1 | VUSB | SDA | SDA | 3V3 | 3V3 | SCL | GND | SCL | GND | UPDI | UPDI